# Altium PCB FAT41.PCBDOC
Units mm, origin at the board's own origin, x right, y up, seen from the top; angles counter-clockwise.
Board outline 111.4 x 161.1 mm, 2 copper layers (Top Layer, Bottom Layer); 102 components, 268 nets, 378 pads, 212 vias.
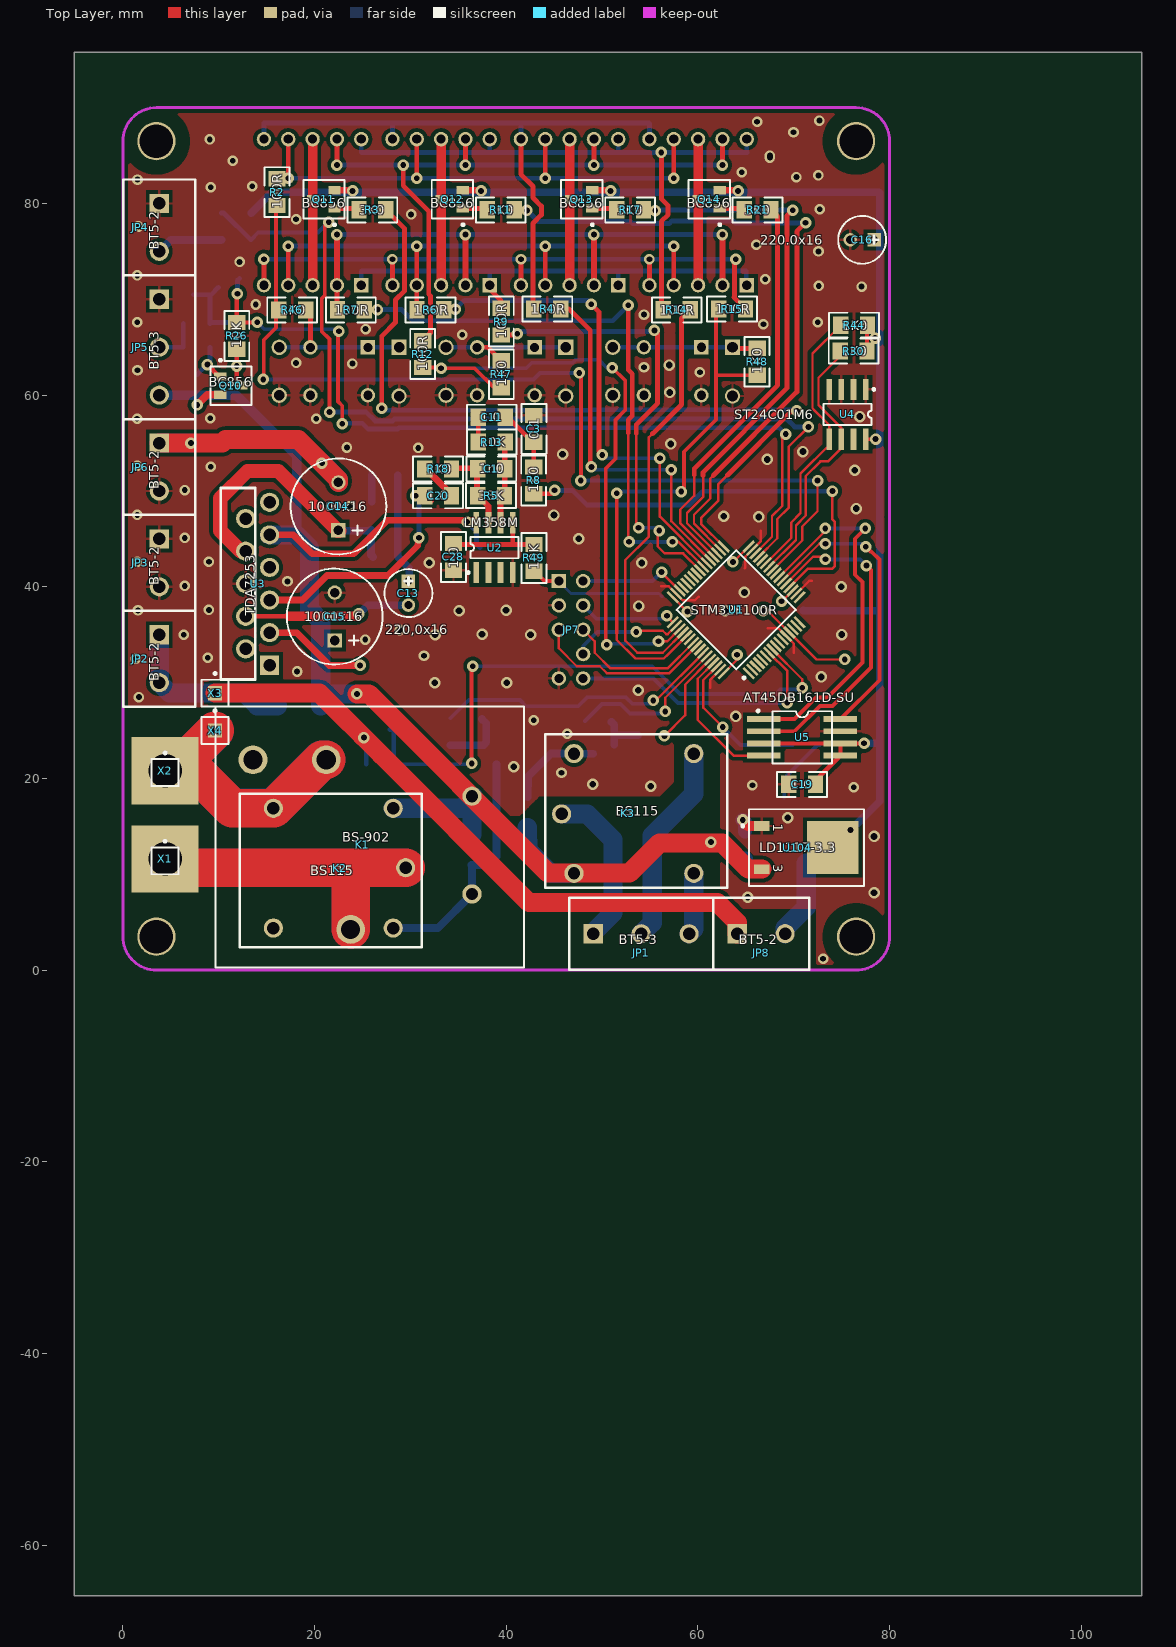
[diagram p0: Top Layer view]
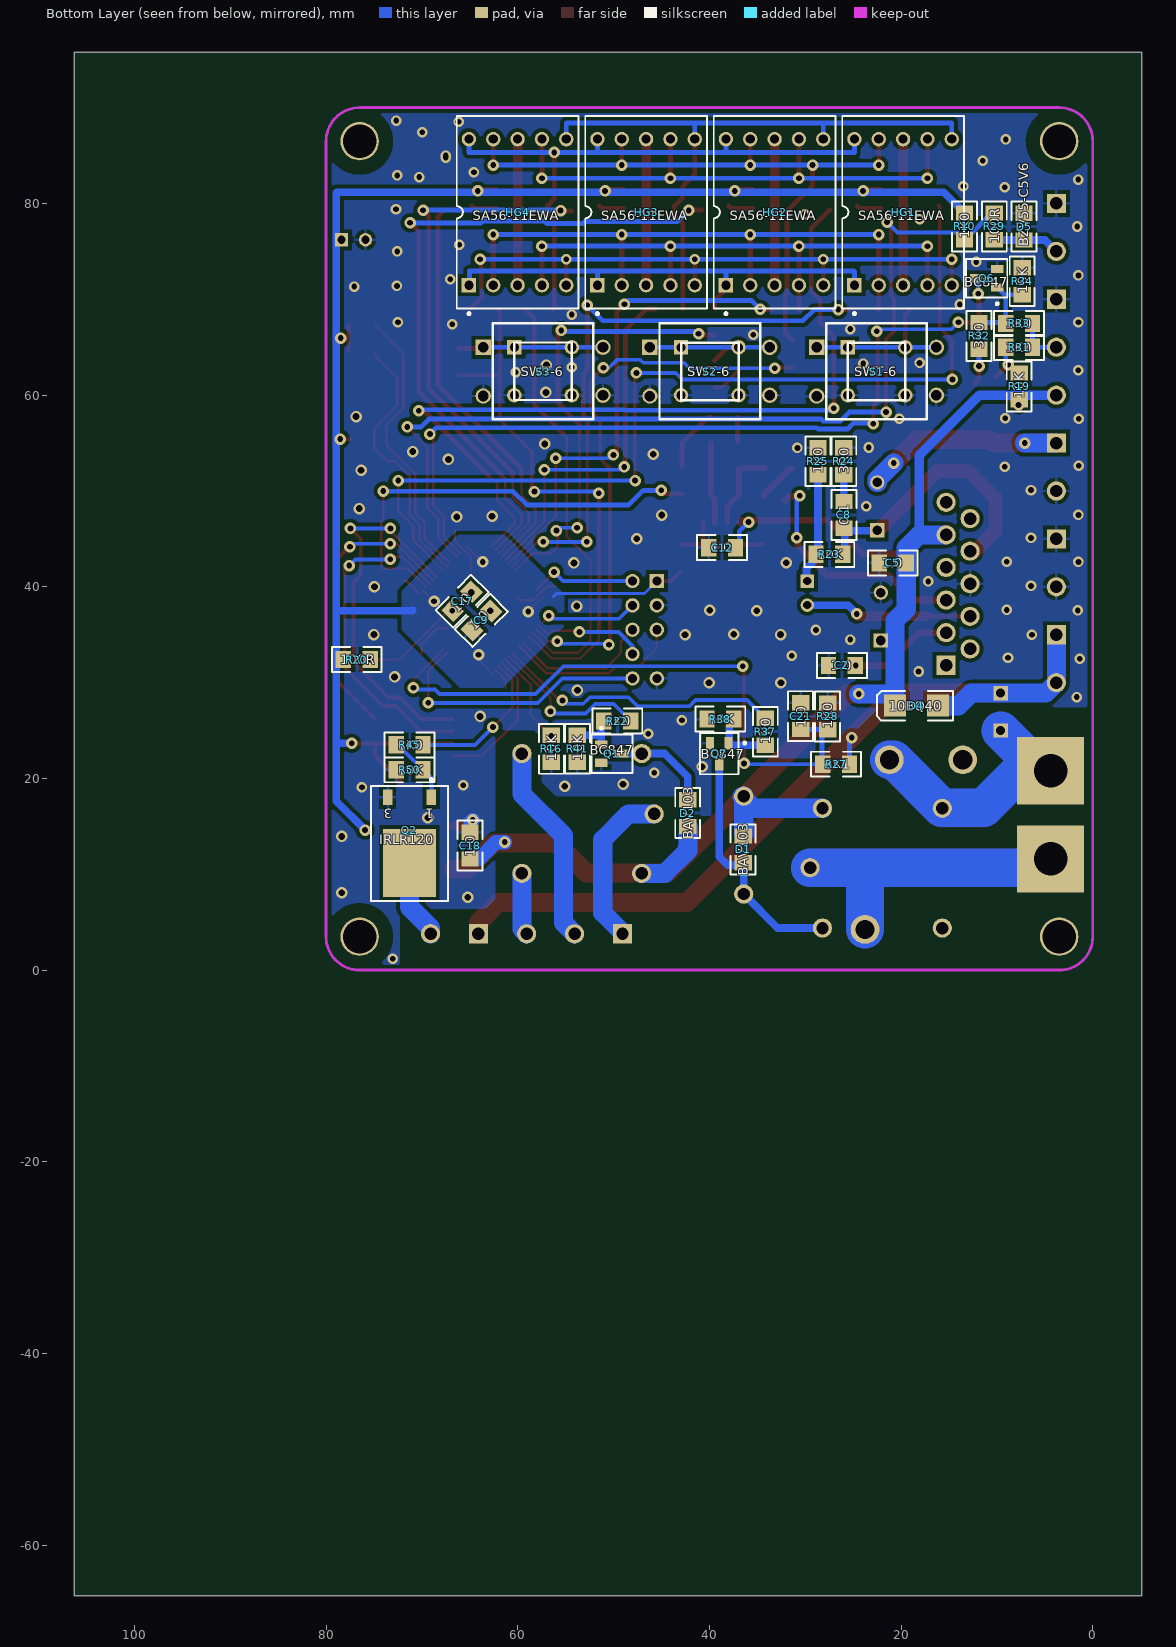
[diagram p1: Bottom Layer view, seen from below]

## Layer stack, top to bottom
Top Layer: signal copper 0.0356
Dielectric: dielectric 0.32, FR-4, Dk 4.8
Bottom Layer: signal copper 0.0356

## Board outline
-5.1,94.4 -5.1,-65.3 106.3,-65.3 106.3,95.8 -5.1,95.8

## Design rules (kind name [scope] priority, off if disabled: settings)
Clearance Clearance_1 [HasPad('Free-3') vs InPoly] p1: gap=1.5
Clearance Polygon [All vs InPoly] p2: gap=0.4
Clearance [All] p3: gap=0.19
ComponentClearance [All] p1: gap=0.254 collisioncheckmode=0
HoleSize [All] p1: absolutevalues=TRUE maxlimit=5 minlimit=0.025 maxpercent=80.000 minpercent=20.000
MinimumAnnularRing [All] p1: minimumring=0.25
PolygonConnect [All] p1: connectstyle=Relief reliefconductorwidth=0.254 reliefentries=4 polygonreliefangle="90 Angle"
RoutingLayers [All] p1: top layer=Horizontal bottom layer=Vertical
RoutingVias [All] p1: holewidth=0.6 width=1.2 viastyle="Through Hole" minholewidth=0.6 minwidth=1.1 maxholewidth=0.8 maxwidth=1.3
SolderMaskExpansion [All] p1: expansion=0.102
TestPointUsage [All] p1: valid=0 allowmultiple=FALSE
Testpoint [All] p1: side=15 testpointundercomponent=TRUE minsize=1.016 maxsize=2.54 preferedsize=1.524 minholesize=0 maxholesize=1.016 preferedholesize=0.813 testpointgrid=0.025 style=1023 order=-539222988
Width [All] p1: maxlimit=5 minlimit=0.2 preferedwidth=0.254 toplayer_prefwidth=0.25 bottomlayer_prefwidth=0.3 minimp=50.000000 maximp=50.000000 favimp=50.000000
15 further rules are at their usual default settings.

## Classes and differential pairs
component class BTp: C12 C15 C16 C18 C19 D1 D2 D4 JP1 JP2 JP3 JP8 K1 K2 K3 P0_18 Q1 Q2 Q7 R22 R37 R38 R41 R45 R50 U104 X1 X2 X3 X4
component class FAT6: C1 C2 C3 C5 C8 C9 C11 C13 C14 C17 C20 C21 C22 C28 D5 HG1 HG2 HG3 HG4 JP4 JP5 JP6 JP7 P0_1 P0_15 P0_17 P0_18 P0_22 Q6 Q10 Q11 Q12 Q13 Q14 R2 R3 R4 R5 R6 R7 R8 R9 R10 R11 R12 R13 R14 R15 R16 R17 R18 R19 R20 R21 R23 R24 R25 R26 R27 R28 R29 R30 R31 R32 R33 R34 R44 R46 R47 R48 R49 S1 S2 S3 U1 U2 U3 U4 U5 X5 X6 X7 X8 X9 X11

## Components (designator, comment, footprint, x,y, rotation, side; value= is the part's Value field where it differs from the comment)
C1 "1n0" _1206#1 38.451,52.324 r0 top (schematic designator C?)
C2 "1.0" C3216-1206#1 26.174,31.792 r0 bottom (schematic designator C?)
C3 "0.1" _1206#1 42.874,56.492 r90 top (schematic designator C?)
C5 "1.0" C3216-1206#1 20.874,42.492 r0 bottom
C8 "0.1" C3216-1206#1 25.974,47.492 r270 bottom
C9 "1.0" C3216-1206#2 63.8,36.5 r315 bottom
C11 "1.0" _1206#1 38.474,57.692 r180 top (schematic designator C?)
C12 "1.0" _1206#1 38.674,44.092 r180 bottom
C13 "220,0x16" el3 29.8,40.6 r270 top
C14 "1000x16" el5 22.481,50.891 r270 top
C15 "1000x16" el5 22.1,39.4 r270 top
C16 "220.0x16" el3 78.4,76.2 r180 top
C17 "1.0" _1206#2 65.8,38.5 r135 bottom
C18 "1.0" _1206#1 64.974,12.992 r270 bottom
C19 "1.0" _1206#1 70.874,19.392 r0 top
C20 "1.0" _1206#1 32.874,49.493 r180 top (schematic designator C?)
C21 "1.0" _1206#1 30.474,26.492 r270 bottom
C28 "1.0" _1206#1 34.5,43.1 r270 top
D1 "BAV103" _1206d 36.474,12.592 r270 bottom
D2 "BAV103" _1206d 42.274,16.392 r90 bottom
D4 "10BQ40" DSO-C2/X2.3 18.4,27.597 r0 bottom
D5 "BZV55-C5V6" _1206d 7.174,77.592 r90 bottom
HG1 "SA56-11EWA" DIP10 19.787,79.096 r90 bottom
HG2 "SA56-11EWA" DIP10 33.195,79.096 r90 bottom
HG3 "SA56-11EWA" DIP10 46.603,79.096 r90 bottom
HG4 "SA56-11EWA" DIP10 60.011,79.096 r90 bottom
JP1 "BT5-3" BT5-3 49.074,3.792 r0 top
JP2 "BT5-2" BT5-2-1 3.8,32.497 r270 top
JP3 "BT5-2" BT5-2-1 3.8,42.497 r270 top
JP4 "BT5-2" BT5-2-1 3.8,77.497 r270 top
JP5 "BT5-3" BT5-3 3.8,69.997 r270 top
JP6 "BT5-2" BT5-2-1 3.8,52.497 r270 top
JP7 "CORTEX_DEBUG_CONNECTOR_PAL" CORTEX_DEBUG_CONNECTOR 45.5,40.6 r270 top
JP8 "BT5-2" BT5-2-1 66.6,3.8 r0 top
K1 "BS-902" BS-902 25,13.097 r90 top
K2 "BS115" BS115 28.2,4.397 r90 top
K3 "BS115" BS115 47.074,22.592 r270 top
Q1 "BC847" SO-G3 50.174,22.592 r270 bottom (schematic designator Q7)
Q2 "IRLR120" SIP-G3/E8 71.3,14.6 r0 bottom
Q6 "BC847" SO-G3 11.074,72.192 r90 bottom
Q7 "BC847" SO-G3 38.974,22.592 r0 bottom
Q10 "BC856" SO-G3 11.274,60.992 r270 top
Q11 "BC856" SO-G3 20.978,80.431 r90 top
Q12 "BC856" SO-G3 34.378,80.431 r90 top
Q13 "BC856" SO-G3 47.878,80.431 r90 top
Q14 "BC856" SO-G3 61.178,80.431 r90 top
R2 "100R" _1206#1 16.074,81.192 r90 top
R3 "3K0" _1206#1 26.039,79.337 r0 top
R4 "100R" _1206#1 44.274,68.992 r180 top
R5 "33K" _1206#1 38.425,49.519 r0 top (schematic designator R?)
R6 "100R" _1206#1 32.074,68.892 r180 top
R7 "100R" _1206#1 23.774,68.892 r180 top
R8 "1K0" _1206#1 42.874,51.092 r270 top (schematic designator R?)
R9 "100R" _1206#1 39.474,67.692 r90 top
R10 "1K0" _1206#1 13.374,77.592 r270 bottom
R11 "3K0" _1206#1 39.439,79.337 r0 top
R12 "100R" _1206#1 31.274,64.292 r90 top
R13 "10K" _1206#1 38.474,55.092 r180 top (schematic designator R?)
R14 "100R" _1206#1 57.774,68.892 r180 top
R15 "100R" _1206#1 63.574,68.992 r0 top
R16 "10K" _1206#2 56.5,23.1 r90 bottom
R17 "3K0" _1206#1 52.939,79.337 r0 top
R18 "1K0" _1206#1 32.874,52.293 r180 top (schematic designator R?)
R19 "10K" _1206#1 7.674,60.892 r270 bottom
R20 "100R" _1206#2 76.8,32.4 r0 bottom
R21 "3K0" _1206#1 66.239,79.337 r0 top
R22 "1K0" _1206#1 49.6,26 r180 bottom (schematic designator R37)
R23 "10K" _1206#1 27.474,43.392 r180 bottom
R24 "3R0" _1206#1 25.974,53.092 r270 bottom
R25 "1K0" _1206#1 28.674,53.092 r270 bottom
R26 "10K" _1206#1 11.874,66.192 r90 top
R27 "5K1" _1206#1 26.774,21.492 r180 bottom
R28 "1K0" _1206#1 27.674,26.492 r90 bottom
R29 "100R" _1206#1 10.274,77.592 r270 bottom
R30 "1K0" _1206#2 76.25,64.602 r0 top
R31 "3K0" _1206#1 7.674,64.992 r180 bottom
R32 "3K0" _1206#1 11.874,66.192 r90 bottom
R33 "3K0" _1206#1 7.674,67.492 r180 bottom
R34 "10K" _1206#1 7.374,71.892 r90 bottom
R37 "1K0" _1206#1 34.174,24.892 r90 bottom
R38 "10K" _1206#1 38.874,26.192 r0 bottom
R41 "10K" _1206#1 53.774,23.092 r270 bottom
R44 "1K0" _1206#2 76.3,67.3 r0 top
R45 "1K0" _1206#1 71.3,23.5 r0 bottom
R46 "1K0" _1206#1 17.674,68.892 r0 top
R47 "1K0" _1206#1 39.474,62.192 r90 top
R48 "1K0" _1206#1 66.174,63.492 r90 top
R49 "10K" _1206#1 42.9,43 r270 top
R50 "10K" _1206#1 71.3,20.9 r0 bottom
S1 "SWT-6" SWT-6-9 22.579,62.488 r180 bottom
S2 "SWT-6" SWT-6-9 39.979,62.488 r180 bottom
S3 "SWT-6" SWT-6-9 57.374,62.492 r180 bottom
U1 "STM32F100R" F-QFP10X10-G64/N 64,37.6 r135 top
U2 "LM358M" SO-G8#1 38.774,44.093 r0 top
U3 "TDA7253" Clipwatt11 15.3,31.797 r90 top
U4 "ST24C01M6" SO-G8#2 75.6,58 r180 top
U5 "AT45DB161D-SU" at45w 70.874,24.292 r270 top (schematic designator U?)
U104 "LD1117-3.3" SIP-G3/C7.4 70.374,12.792 r270 top
X1 "" PIN3 4.4,11.397 r0 top
X2 "" PIN3 4.4,20.597 r0 top
X3 "" PIN1 9.6,28.897 r0 top
X4 "" PIN1 9.6,24.997 r0 top

## Footprints (in the part's own frame and the unit in brackets; to place one, negate y for a bottom-side part, rotate by r counter-clockwise, add the part's x,y. Pads: shape width x height; smd on the part's side, far side on the other; paste and mask are expansions set on the pad)
_1206#1 [mm]
  rect 1.6x1.8 smd: 1(-1.412,-0.007) 2(1.388,-0.007)
  silkscreen extent -2.61,-1.31 2.59,1.29
_1206#2 [mm]
  rect 1.6x1.8 smd: 1(-1.404,-0.002) 2(1.396,-0.002)
  silkscreen extent -2.6,-1.3 2.6,1.3
_1206d [mm]
  rect 1.6x1.8 smd: 1(1.395,-0.009) 2(-1.405,-0.009)
  silkscreen extent -2.6,-1.31 2.6,1.29
at45w [mm]
  rect 0.6x3.5 smd: 1(-1.905,-4) 2(-0.635,-4) 3(0.635,-4) 4(1.905,-4) 5(1.905,4) 6(0.635,4) 7(-0.635,4) 8(-1.905,4)
  silkscreen extent -2.88,-4.72 2.73,3.1
BS115 [mm]
  round 2 hole 1.3: 1(6.292,-1.304) 2(-0.008,12.496) 3(12.492,12.496) 4(-0.008,-0.004) 5(12.492,-0.004)
  silkscreen extent -2.01,-3 13.99,16
BS-902 [mm]
  round 3 hole 2: 1(-8.85,1.235) 2(8.85,11.425) 3(8.85,3.775)
  round 2 hole 1.3: 4(-5.15,-11.425) 5(5.05,-11.425)
  silkscreen extent -12.8,-16.84 14.4,15.36
BT5-2-1 [mm]
  round 2 on Top Overlay: 0(-2.5,-4)
  rect 2x2 hole 1.3: 1(-2.5,0)
  round 2 hole 1.3: 2(2.5,0)
  silkscreen extent -5,-3.75 5,3.75
BT5-3 [mm]
  round 2 on Top Overlay: 0(-0.001,-4.001)
  rect 2x2 hole 1.3: 1(-0.001,-0.001)
  round 2 hole 1.3: 2(4.999,-0.001) 3(9.999,-0.001)
  silkscreen extent -2.5,-3.75 12.5,3.75
C3216-1206#1 [mm]
  rect 1.6x1.8 smd: 1(-1.405,0.002) 2(1.395,0.002)
  silkscreen extent -2.6,-1.3 2.6,1.3
C3216-1206#2 [mm]
  rect 1.6x1.8 smd: 1(-1.397,0.007) 2(1.403,0.007)
  silkscreen extent -2.6,-1.29 2.6,1.31
Clipwatt11 [mm]
  rect 2x2 hole 1.3: 1(0.022,-0.004)
  round 2 hole 1.3: 2(1.722,2.496) 3(3.422,-0.004) 4(5.122,2.496) 5(6.822,-0.004) 6(8.522,2.496) 7(10.222,-0.004) 8(11.922,2.496) 9(13.622,-0.004) 10(15.322,2.496) 11(17.022,-0.004)
  silkscreen extent -1.48,1.5 18.52,5.1
CORTEX_DEBUG_CONNECTOR [mm]
  rect 1.5x1.5 hole 0.95: 1(0.001,-0.012)
  round 1.5 hole 0.95: 2(0.001,2.528) 3(2.541,-0.012) 4(2.541,2.528) 5(5.081,-0.012) 6(5.081,2.528) 8(7.621,2.528) 9(10.161,-0.012) 10(10.161,2.528)
DIP10 [mm]
  rect 1.5x1.5 hole 0.95: 1(-7.626,5.086)
  round 1.5 hole 0.95: 2(-7.626,2.546) 3(-7.626,0.006) 4(-7.626,-2.534) 5(-7.626,-5.074) 6(7.614,-5.074) 7(7.614,-2.534) 8(7.614,0.006) 9(7.614,2.546) 10(7.614,5.086)
  silkscreen extent -10.71,-6.34 10.03,6.36
DSO-C2/X2.3 [mm]
  rect 2.3x2.3 smd: 1(-2.252,0.001) 2(2.248,0.001)
  silkscreen extent -3.8,-1.55 4.1,1.55
el3 [mm]
  rect 1.4x1.4 hole 0.85: 1(0.011,-0.008)
  round 1.4 hole 0.85: 2(2.511,-0.008)
  silkscreen extent -1.24,-2.5 3.76,2.49
el5 [mm]
  rect 1.5x1.5 hole 1: 1(5.001,0.007)
  round 1.5 hole 1: 2(0.001,0.007)
  silkscreen extent -2.5,-4.99 7.5,5.01
F-QFP10X10-G64/N [mm]
  rect 1.6x0.3 smd: 1(-5.598,3.754) 2(-5.598,3.254) 3(-5.598,2.754) 4(-5.598,2.254) 5(-5.598,1.754) 6(-5.598,1.254) 7(-5.598,0.754) 8(-5.598,0.254) 9(-5.598,-0.246) 10(-5.598,-0.746) 11(-5.598,-1.246) 12(-5.598,-1.746) 13(-5.598,-2.246) 14(-5.598,-2.746) 15(-5.598,-3.246) 16(-5.598,-3.746) 33(5.602,-3.746) 34(5.602,-3.246) 35(5.602,-2.746) 36(5.602,-2.246) 37(5.602,-1.746) 38(5.602,-1.246) 39(5.602,-0.746) 40(5.602,-0.246) 41(5.602,0.254) 42(5.602,0.754) 43(5.602,1.254) 44(5.602,1.754) 45(5.602,2.254) 46(5.602,2.754) 47(5.602,3.254) 48(5.602,3.754)
  rect 0.3x1.6 smd: 17(-3.748,-5.596) 18(-3.248,-5.596) 19(-2.748,-5.596) 20(-2.248,-5.596) 21(-1.748,-5.596) 22(-1.248,-5.596) 23(-0.748,-5.596) 24(-0.248,-5.596) 25(0.252,-5.596) 26(0.752,-5.596) 27(1.252,-5.596) 28(1.752,-5.596) 29(2.252,-5.596) 30(2.752,-5.596) 31(3.252,-5.596) 32(3.752,-5.596) 49(3.752,5.604) 50(3.252,5.604) 51(2.752,5.604) 52(2.252,5.604) 53(1.752,5.604) 54(1.252,5.604) 55(0.752,5.604) 56(0.252,5.604) 57(-0.248,5.604) 58(-0.748,5.604) 59(-1.248,5.604) 60(-1.748,5.604) 61(-2.248,5.604) 62(-2.748,5.604) 63(-3.248,5.604) 64(-3.748,5.604)
  silkscreen extent -5.72,-4.4 4.4,4.58
PIN1 [mm]
  rect 1.5x1.5 hole 0.95: 1(0.012,0.005)
  silkscreen extent -1.39,-1.4 1.41,2.18
PIN3 [mm]
  rect 7x7 hole 3.5: 1(0.003,0.209)
  silkscreen extent -1.4,-1.39 1.4,2.19
SIP-G3/C7.4 [mm]
  rect 1x1.6 smd: 1(-2.25,-3.7) 3(2.25,-3.7)
  rect 5.5x5.4 smd: 4(0,3.7)
  silkscreen extent -4,-5.82 4,6.95
SIP-G3/E8 [mm]
  rect 1x1.6 smd: 1(-2.285,-3.431) 3(2.285,-3.431)
  rect 5.5x7.1 smd: 4(0,3.419)
  silkscreen extent -4,-5.41 4,7.37
SO-G3 [mm]
  rect 0.85x1.3 smd: 1(-0.948,-1.102) 2(0.952,-1.102) 3(0.002,1.098)
  silkscreen extent -2.77,-2.15 2,2.15
SO-G8#1 [mm]
  rect 0.6x2.2 smd: 1(-1.902,-2.611) 2(-0.632,-2.611) 3(0.638,-2.611) 4(1.908,-2.611) 5(1.908,2.589) 6(0.638,2.589) 7(-0.632,2.589) 8(-1.902,2.589)
  silkscreen extent -2.88,-2.74 2.5,1.09
SO-G8#2 [mm]
  rect 0.6x2.2 smd: 1(-1.905,-2.6) 2(-0.635,-2.6) 3(0.635,-2.6) 4(1.905,-2.6) 5(1.905,2.6) 6(0.635,2.6) 7(-0.635,2.6) 8(-1.905,2.6)
  silkscreen extent -2.88,-2.72 2.5,1.1
SWT-6-9 [mm]
  rect 1.6x1.6 hole 1.1: 1(-6.234,2.497)
  rect 1.5x1.5 hole 0.95: 1(-2.984,2.499)
  round 1.5 hole 0.95: 1(3.016,2.499) 2(-2.984,-2.501) 2(3.016,-2.501)
  round 1.6 hole 1.1: 1(6.266,2.497) 2(-6.234,-2.583) 2(6.266,-2.503)
  silkscreen extent -5.23,-5 5.27,5

## Part data
C1 C2 C3 C5 C8 C9 C11 C17 C20 C21 C28: library part "Cap Semi", "Capacitor (Semiconductor SIM Model)"
C12 C18 C19: library part Cap, "Capacitor"
C13 C14 C15: library part "Cap Pol1", "Polarized Capacitor (Radial)"
C16: library part "Cap Pol", "Polarized Capacitor (Radial)"
D1 D2 D4: library part 10BQ015, "Schottky Rectifier"
D5: library part "D Zener", "Zener Diode"
HG1 HG2 HG3 HG4: library part SA05
JP1 JP5: library part "Header 3", "Header, 3-Pin"
JP2 JP3 JP4 JP6 JP8: "Header, 3-Pin"
K1: library part BS115, "Single-Pole Dual-Throw Relay"
K2 K3: "Single-Pole Dual-Throw Relay"
Q1 Q6 Q7: library part BC847ALT1, "General Purpose Transistor NPN Silicon"
Q2: library part IRFR120, "HEXFET N-Channel Power MOSFET"
Q10 Q11 Q12 Q13 Q14: library part GT109
R2 R3 R4 R6 R7 R9 R10 R11 R12 R14 R15 R16 R17 R19 R21 R23 R24 R25 R26 R30 R44 R46 R47 R48: library part RES, "Resistor"
R5 R8 R13 R18 R20 R22 R27 R28 R29 R31 R32 R33 R34 R37 R38 R41 R45 R49 R50: library part Res2, "Resistor"
S1 S2 S3: "Switch"
U1: "STM32 ARM-based 32-bit MCU with 64 Kbytes Flash, 64-pin LQFP, Industrial Temperature"
U2: "Low-Power Dual Operational Amplifier"
U4: "Serial 1K (128 x 8) EEPROM"
U104: library part REG1117-3.3, "800mA and 1A Low Dropout Positive Regulator 2.85V, 3.3V, 5V, and Adjustable"
X1 X2 X3 X4: library part Socket, "Socket"

## Free pads (board coordinates)
  round 4 hole 3.5: 3(3.5,3.5) 3(3.5,86.5) 3(76.5,3.5) 3(76.5,86.5)

## Via types
v1: diameter 1.2, hole 0.6, Top Layer to Bottom Layer, 105 vias
v2: diameter 1.1, hole 0.6, Top Layer to Bottom Layer, 70 vias
v3: diameter 1.2, hole 0.7, Top Layer to Bottom Layer, 37 vias

## Nets (pads, with @x,y where several pads share a name; then routed paths per layer and width w, separated by ;. In a path a pad name is that pad's centre, name@x,y a point inside that pad or via, vN(x,y) a via of type N, cw(c..) or ccw(c..) an arc to the next point about the centre after c; other vN are vias at no path point)
+3V3: C9.2 C16.1 C19.2 JP7.1 Q11.2 Q12.2 Q13.2 Q14.2 R10.1 R20.2 R30.2 R44.2 R49.2 U1.19 U1.32 U1.48 U1.64 U4.8 U5.3 U5.5 U5.6 U104.4 | length 194.3
  Top Layer w0.25: U1.48 58.875,37.415 v1(58.91,37.415) ; U1.64 64.084,32.383 v1(64.084,32.917) ; v1@63.909,42.789 63.909,42.814 U1.32 ; v1(68.732,38.49) 68.777,38.49 U1.19
  Top Layer w0.4: R49.2@43.039,41.564 44.004,40.599 JP7.1 ; U5.3 77.319,23.657 v1(77.33,23.669) ; U5.5 U5.6 ; U4.8 78.519,55.4 v1(78.53,55.411) ; R30.2 77.646,67.248 R44.2 ; 77.646,65.958 v1(78.48,65.958)
  Top Layer w0.5: C19.2@72.261,19.467 C19.2 72.261,19.772 U5.5@74.856,22.367
  Top Layer w0.7: Q11.2 23.887,81.383 v1(23.969,81.302) ; Q12.2@35.477,81.383 v1@37.284,81.383 ; Q13.2@48.998,81.383 v1@50.805,81.383 ; Q14.2@62.295,81.383 v1@64.102,81.383
  Bottom Layer w0.3: JP7.1 46.772,39.315 55.924,39.315 56.274,38.965
  Bottom Layer w0.8: R10.1 15.552,81.177 78.88,81.177 78.955,81.102 78.955,17.645 v1(75.931,14.621) ; 70.974,37.54 71.024,37.49 78.955,37.49 ; v1(77.33,23.669) 78.955,23.669
  other v1: 63.659,42.589 37.365,81.302 50.887,81.302 64.184,81.302
+12: D4.1 JP2.1 JP2.2 JP8.1 R27.2 X3.1 | length 87.1
  Top Layer w2: X3.1 20.51,28.902 26.945,22.467 42.364,7.048 62.034,7.048 64.1,4.982 JP8.1 ; v1@24.969,24.444 v1(25.144,24.269)
  Bottom Layer w0.5: v1(25.144,24.269) 25.144,24.069 25.386,23.826 R27.2
  Bottom Layer w2: JP2.1 JP2.2 4.895,28.902 X3.1 12.71,28.902 14.016,27.596 D4.1
+12V: C5.1 C12.2 C15.1 C18.2 D1.2 D2.2 D4.2 JP5.3 K1.5 K2.5 K3.5 Q10.2 R19.2 U2.8 U3.9 U104.3 | length 158.6
  Top Layer w0.7: U3.9 17.786,45.42 19.745,43.461 24.094,43.461 27.568,46.935 36.618,46.935 U2.8
  Top Layer w0.8: v1(7.748,58.982) 8.806,60.041 Q10.2
  Top Layer w2: v1(24.419,28.818) 25.691,28.818 44.364,10.145 52.861,10.145 55.986,13.269 62.534,13.269 65.261,10.542 U104.3
  Bottom Layer w0.5: v1(35.916,46.76) 36.891,45.786 36.891,44.481 C12.2
  Bottom Layer w1: JP5.3 11.805,59.999 18.12,53.684 18.12,45.261
  Bottom Layer w1.5: v1(61.359,13.369) 61.334,13.344 62.284,13.344 64.023,11.605 C18.2
  Bottom Layer w2: U3.9 18.111,45.42 19.47,44.061 19.47,37.638 20.648,36.46 D4.2 ; 20.795,28.768 20.845,28.818 v1(24.419,28.818) ; K2.5 35.362,16.89 K1.5@36.591,18.118 ; D1.2@36.425,14.185 K1.5 ; D2.2@42.189,14.869 42.265,12.494 44.658,10.1 K3.5
GND: C2.2 C3.2 C5.2 C9.1 C12.1 C15.2 C16.2 C17.2 C18.1 C19.1 C21.1 C28.2 D5.1 JP3.1 JP3.2 JP4.1 JP5.1 JP6.2 JP7.3 JP7.9 Q1.2 Q2.3 Q6.2 Q7.2 R16.1 R24.1 R25.1 R28.2 R34.2 R38.2 R41.2 R50.2 S1.2 S2.2 S3.2 U1.12 U1.18 U1.31 U1.47 U1.63 U2.4 U3.6 U4.1 U4.2 U4.3 U4.4 U5.7 U104.1 | length 21.7
  Top Layer w0.25: 56.174,40.04 56.958,40.04 58.408,38.59 59.699,38.59 60.074,38.965 ; 61.274,29.442 61.274,30.28 U1.63 ; 64.874,41.939 64.933,41.999 64.933,43.132 66.574,44.772 66.574,45.838 ; 67.274,35.691 68.378,35.691 70.007,34.062 70.007,33.095 ; U1.18 71.608,40.615 71.874,40.615
  Top Layer w1: v1(64.683,15.668) 64.683,15.541 65.182,15.042 U104.1
  Bottom Layer w1.5: v1(64.683,15.668) 64.908,15.443 C18.1@64.908,14.494
  other v2: 73.056,1.195 76.255,19.095 65.683,19.295 45.763,20.595 46.374,24.666 42.874,26.066 1.675,28.495 18.174,31.164 1.35,32.495 8.848,32.595 31.417,32.795 25.294,34.495 6.348,34.995 28.893,35.495 1.574,37.538 8.974,37.588 6.448,40.095 17.174,40.562 1.5,42.595 8.974,42.612 6.448,45.095 1.5,47.495 23.644,48.395 6.448,50.095 9.174,52.534 1.474,52.634 30.817,54.495 23.374,54.533 1.474,57.533 20.174,57.533 9.123,57.595 60.21,62.395 1.525,62.595 54.374,62.909 23.944,63.295 18.074,63.356 35.416,66.295 25.319,66.895 66.833,67.395 1.5,67.595 72.506,67.595 54.374,68.407 13.874,69.457 77.074,71.332 72.606,71.395 67.033,72.095 1.5,72.495 12.172,73.895 72.581,74.995 66.108,75.695 1.625,77.595 18.074,78.355 30.074,78.855 72.706,79.395 9.174,81.702 13.497,81.795 1.525,82.495 70.274,82.754 72.574,82.926 64.574,83.251 11.474,84.451 67.508,84.795 67.508,84.995 9.074,86.675 69.974,87.428 66.174,88.525 72.674,88.65
  other v3: 65.208,7.595 78.374,8.073 78.374,13.946 69.382,15.895 55.086,19.195 49.012,19.395 40.774,21.22 63.934,26.468 53.774,29.218 32.542,29.995 40.04,29.995 72.856,30.592 42.539,34.995 32.574,35.016 75.006,35.016 37.474,35.041 35.074,37.49 62.859,37.49 39.974,37.565 53.836,37.995 64.858,39.415 74.956,40.015 54.136,42.489 31.974,42.514 47.574,45.013 66.358,47.288 62.684,47.363 44.974,47.488 76.53,48.163 76.355,52.162 67.233,53.286 45.874,53.836 70.957,54.111 57.174,54.911 76.874,57.76 57.06,60.285 57.01,63.134
NetC1_1: C1.1 R5.1 R18.1 U2.7 | length 8.9
  Top Layer w0.6: R18.1@34.166,52.359 36.916,52.359 36.941,52.334 36.941,49.61 37.165,49.385 38.141,48.409 U2.7
NetC1_2: C1.2 R5.2 R13.1 U2.6 | length 8.5
  Top Layer w0.6: U2.6 39.411,49.111 39.839,49.538 R13.1@39.84,54.958
NetC2_1: C2.1 U3.3 | length 10.9
  Top Layer w0.7: U3.3 18.114,35.22 21.544,31.789 v1@24.744,31.789
  other v1: 24.744,31.79
NetC3_1: C3.1 C11.1 R8.1 | length 6.7
  Top Layer w0.5: C11.1@39.786,57.699 40.149,57.699 42.867,54.98 R8.1
NetC8_1: C8.1 R24.2 | length 2.8
  Bottom Layer w0.8: C8.1 25.972,51.696 R24.2
NetC8_2: C8.2 C14.1 R23.2 U3.8 | length 29.4
  Top Layer w1: U3.8@12.288,43.72 U3.8
  Top Layer w1.5: U3.8@12.288,43.72 10.147,45.861 10.147,49.235 12.997,52.084 16.221,52.084 22.444,45.861 C14.1@22.594,45.861
  Bottom Layer w0.8: C14.1@22.594,45.861 C8.2@25.893,45.861 ; C8.2@25.893,45.961 25.893,43.311 R23.2@26.093,43.111
NetC11_2: C11.2 R13.2 | length 2.6
  Top Layer w0.5: R13.2 C11.2
NetC13_1: C13.1 R23.1 R25.2 | length 11.5
  Bottom Layer w0.8: R25.2@28.668,51.609 28.668,43.136 29.866,41.939 C13.1@29.866,40.581
NetC13_2: C13.2 U3.4 | length 17.6
  Top Layer w0.5: U3.4 14.303,36.92 14.321,36.938 17.346,36.938
  Top Layer w1: 17.346,36.938 24.394,36.938 v1(24.619,37.163)
  Bottom Layer w0.8: v1@24.569,37.113 25.537,38.081 C13.2@29.866,38.081
NetC14_2: C14.2 JP6.1 | length 26.9
  Top Layer w2: JP6.1 v1(7.098,54.997) 10.361,54.997 10.722,55.358 18.32,55.358 22.481,51.197 C14.2@22.481,50.891
  Bottom Layer w2: JP6.1 v1(7.098,54.997) ; v1(20.77,52.909) 22.481,51.197 C14.2@22.481,50.891
NetC17_1: C17.1 R20.1 U1.13 | length 10.6
  Top Layer w0.25: v1(66.833,37.49) 67.285,37.49 72.359,32.417 v1(75.331,32.417)
NetC20_1: C20.1 R18.2 | length 4
  Top Layer w0.7: R18.2 31.627,52.299 34.286,49.64 C20.1
NetC20_2: C20.2 U3.5 | length 25
  Top Layer w0.7: U3.5 18.727,38.62 21.295,41.187 27.668,41.187 30.761,44.28 30.867,45.086 v1(30.892,45.111) ; v1(30.567,49.51) 30.617,49.46 31.642,49.46 C20.2@32.136,48.966
  Bottom Layer w0.5: v1(30.567,49.51) 30.892,49.185 v1(30.892,45.111)
NetC28_1: C28.1 R49.1 U2.5 | length 10.8
  Top Layer w0.5: C28.1 34.593,44.412 R49.1 ; U2.5 40.681,44.521 40.79,44.412
NetD1_1: D1.1 K1.4 K2.4 Q7.3 | length 25
  Bottom Layer w0.8: K2.4 32.867,4.39 K1.4 D1.1@36.425,10.66 ; D1.1@36.366,10.97 38.09,10.97 38.975,11.855 Q7.3
NetD2_1: D2.1 K3.4 Q1.3 | length 9.9
  Bottom Layer w0.8: D2.1@42.239,18.068 42.265,20.193 44.672,22.6 K3.4 47.079,22.591 Q1.3
NetD5_2: D5.2 JP4.2 R29.2 | length 7
  Bottom Layer w0.8: JP4.2 4.99,76.188 10.263,76.188 R29.2
NetHG1_1: HG1.1 HG2.1 HG3.1 HG4.1 R9.2 | length 49
  Top Layer w0.5: HG2.1 38.281,71.038 39.48,69.839 R9.2
  Bottom Layer w0.5: HG1.1 24.873,72.899 24.927,72.954 65.033,72.954 65.033,71.533 HG4.1 ; HG2.1 38.281,72.938 ; 51.662,72.954 51.689,72.927 HG3.1
NetHG1_2: HG1.2 HG2.2 HG3.2 HG4.2 R7.2 | length 63.9
  Top Layer w0.5: HG1.2 22.333,68.952 R7.2
  Top Layer w0.6: HG1.2 v1(22.333,76.751) ; HG2.2 v1(35.741,76.751) ; HG3.2 v1(49.149,76.751) ; HG4.2 v1(62.557,76.751)
  Bottom Layer w0.5: v1(22.333,76.751) v1(35.741,76.751) v1(62.557,76.751)
NetHG1_3: HG1.3 HG1.8 Q11.3 | length 15.2
  Top Layer w1: HG1.3 HG1.8
NetHG1_4: HG1.4 HG2.4 HG3.4 HG4.4 R6.2 | length 59.2
  Top Layer w0.5: HG1.4 v1(17.253,75.546) ; R6.2@30.548,68.899 R6.2 30.661,68.924 v1(30.661,75.546) ; HG3.4 v1(44.069,75.546) ; HG4.4 v1(57.477,75.546)
  Bottom Layer w0.5: v1(17.253,75.546) 30.661,75.546 v1@57.477,75.546
NetHG1_5: HG1.5 HG2.5 HG3.5 HG4.5 R15.2 | length 65.5
  Top Layer w0.5: HG1.5 v1@14.713,74.077 ; HG2.5 v2@28.121,74.077 ; HG3.5 v2@41.529,74.077 ; HG4.5 v2@54.937,74.077 ; 63.734,70.213 R15.2 ; v1@63.734,74.028 63.934,74.228 v1(63.934,74.178) ; 63.809,70.304 v1@63.809,74.12
  Bottom Layer w0.5: v1(14.713,74.178) v1(63.934,74.178)
  other v2: 28.118,74.178 41.539,74.178 54.936,74.178
NetHG1_6: HG1.6 HG2.6 HG3.6 HG4.6 R4.2 | length 65.9
  Top Layer w0.5: HG3.6 41.529,83.037 42.789,81.776 42.789,80.602 43.664,79.727 43.664,78.802 42.789,77.927 R4.2@42.789,69.005
  Bottom Layer w0.5: HG1.6 14.713,88.392 41.523,88.392 41.529,88.385 ; HG2.6 28.121,88.388 ; HG3.6 41.529,88.385 ; HG4.6 54.937,88.369 54.921,88.385 41.529,88.385
NetHG1_7: HG1.7 HG2.7 HG3.7 HG4.7 R2.2 | length 56.5
  Top Layer w0.5: v1(17.253,82.632) HG1.7 ; v1(30.661,82.632) HG2.7 ; v1(44.069,82.632) HG3.7 ; v1(57.477,82.632) HG4.7
  Bottom Layer w0.5: v1(17.253,82.632) v1(57.477,82.632)
NetHG1_9: HG1.9 HG2.9 HG3.9 HG4.9 R12.2 | length 70.6
  Top Layer w0.5: v1@22.333,84.101 HG1.9 ; v1(29.243,84.001) 29.243,81.851 31.917,79.177 31.917,70.529 32.092,70.354 32.092,66.491 R12.2 ; v1(35.741,84.001) 35.741,84.101 HG2.9 ; v1@49.149,84.101 HG3.9 ; v1@62.557,84.101 HG4.9
  Bottom Layer w0.5: v1(22.333,84.001) v1(35.741,84.001) v1(62.557,84.001)
  other v1: 49.149,84.001
NetHG1_10: HG1.10 HG2.10 HG3.10 HG4.10 R14.2 | length 62.9
  Top Layer w0.5: v1(56.186,85.326) 56.186,80.477 56.885,79.777 56.885,78.827 56.186,78.127 56.186,69.099 R14.2
  Bottom Layer w0.5: HG1.10 24.873,85.33 24.877,85.326 65.108,85.326 65.097,85.337 HG4.10 ; 38.281,85.335 HG2.10 ; 51.662,85.326 51.689,85.353 HG3.10
NetHG2_3: HG2.3 HG2.8 Q12.3 | length 15.2
  Top Layer w1: HG2.3 HG2.8
NetHG3_3: HG3.3 HG3.8 Q13.3 | length 15.2
  Top Layer w1: HG3.3 HG3.8
NetHG4_3: HG4.3 HG4.8 Q14.3 | length 15.2
  Top Layer w1: HG4.3 HG4.8
NetJP1_1: JP1.1 K3.1 | length 16.8
  Bottom Layer w2: K3.1 48.456,16.3 51.137,13.619 51.137,5.996 JP1.1@49.212,4.071
NetJP1_2: JP1.2 K3.2 | length 21.1
  Bottom Layer w2: JP1.2 55.236,4.955 55.236,14.044 59.57,18.378 K3.2
NetJP1_3: JP1.3 K3.3 | length 6.5
  Bottom Layer w2: JP1.3 59.57,4.289 K3.3
NetJP5_2: JP5.2 R31.2 R33.2 | length 5
  Bottom Layer w0.5: JP5.2 6.273,64.999 R31.2 R33.2
NetJP8_2: JP8.2 Q2.4 | length 8.3
  Bottom Layer w2: JP8.2 69.1,4.391 71.3,6.592 Q2.4
NetK1_1: K1.1 K2.1 X1.1 | length 63.7
  Top Layer w4: X1.1 5.319,10.69 K2.1 K2.1@29.484,10.67 ; K1.1 23.765,10.641 23.794,10.67
  Bottom Layer w4: X1.1 6.237,11.606 7.153,10.69 K2.1 ; K1.1 23.765,10.499
NetK1_3: K1.3 K2.3 X2.1 X4.1 | length 53.9
  Top Layer w4: X2.1 7.484,20.806 11.401,16.89 15.742,16.89 20.8,21.947 K1.3 ; X2.1@5.416,20.806 X4.1
  Bottom Layer w4: X4.1 9.612,24.98 5.437,20.806 X2.1 7.509,20.806 11.372,16.943 15.746,16.943 20.75,21.947 K1.3
NetQ1_1: Q1.1 R22.1 R41.1 | length 5
  Bottom Layer w0.8: R22.1@50.986,25.886 51.276,25.596 Q1.1 ; 51.276,24.491 51.289,24.505 R41.1
NetQ2_1: Q2.1 R45.2 R50.1 | length 7.1
  Bottom Layer w0.4: Q2.1 69.015,20.034 72.487,23.507 R45.2
NetQ6_1: Q6.1 R32.2 R33.1 R34.1 | length 8.7
  Bottom Layer w0.5: R34.1 9.208,70.48 Q6.1 ; 9.073,70.48 9.086,70.466 R33.1 9.18,67.58 R32.2
NetQ7_1: Q7.1 R37.1 R38.1 | length 6.5
  Bottom Layer w0.8: R37.1 37.629,23.48 37.915,23.766 37.915,25.745 R38.1
NetQ10_1: Q10.1 R19.1 R31.1 | length 5.2
  Top Layer w0.5: v1(8.815,63.189) 8.848,63.156 10.063,61.941 Q10.1
  Bottom Layer w0.5: R19.1@7.773,62.157 9.086,63.47 R31.1
NetQ10_3: Q10.3 R26.1 R32.1 | length 5.6
  Top Layer w0.5: v1(11.872,63.031) v1@11.88,63.031 ; R26.1 11.88,61.673 Q10.3@12.347,61.207
  Bottom Layer w0.5: v1(11.872,63.031) R32.1@11.872,64.881
NetQ11_1: Q11.1 R3.1 | length 2.6
  Top Layer w0.5: Q11.1 24.324,79.483 R3.1@24.565,79.725
NetQ12_1: Q12.1 R11.1 | length 2.6
  Top Layer w0.5: Q12.1 37.724,79.483 R11.1@37.965,79.725
NetQ13_1: Q13.1 R17.1 | length 2.6
  Top Layer w0.5: Q13.1 51.223,79.483 R17.1@51.465,79.725
NetQ14_1: Q14.1 R21.1 | length 2.6
  Top Layer w0.5: Q14.1 64.523,79.483 R21.1@64.765,79.725
NetR16_2: R16.2 U1.60 | length 9.9
  Top Layer w0.25: v1(56.511,24.444) 58.66,26.593 58.66,29.787 U1.60
NetR46_2: R46.2 S1.1 | length 16.6
  Top Layer w0.5: R46.2 19.562,68.385 S1.1@19.562,64.987
  Bottom Layer w0.5: S1.1@16.312,64.985 16.314,64.987 28.81,64.987 S1.1@28.812,64.985
NetR47_2: R47.2 S2.1 | length 15.8
  Top Layer w0.5: S2.1@36.962,64.987 38.073,64.987 R47.2
  Bottom Layer w0.5: S2.1@33.712,64.985 36.96,64.985 36.962,64.987 42.962,64.987 46.294,64.987 46.292,64.985 S2.1@46.212,64.985
NetR48_2: R48.2 S3.1 | length 15.1
  Top Layer w0.5: S3.1@63.612,64.985 63.717,64.88 R48.2
  Bottom Layer w0.5: S3.1@51.107,64.989 S3.1@63.607,64.989
P0_2: 
P0_3: 
P0_7: 
P0_8: 
P0_9: 
P0_11: 
P0_13: 
P0_15: 
P0_15: 
P0_15: 
P0_15: 
P0_15: 
P0_15: 
P0_15: 
P0_15: 
P0_15: 
P0_15: 
P0_15: 
P0_15: 
P0_15: 
P0_15: 
P0_15: 
P0_15: 
P0_15: 
P0_15: 
P0_15: 
P0_15: 
P0_15: 
P0_15: 
P0_15: 
P0_15: 
P0_15: 
P0_15: 
P0_15: 
P0_15: 
P0_15: 
P0_15: 
P0_16: 
P0_17: 
P0_17: 
P0_17: 
P0_17: 
P0_17: 
P0_17: 
P0_17: 
P0_17: 
P0_17: 
P0_17: 
P0_17: 
P0_17: 
P0_17: 
P0_17: 
P0_17: 
P0_17: 
P0_17: 
P0_17: 
P0_17: 
P0_17: 
P0_17: 
P0_17: 
P0_17: 
P0_17: 
P0_17: 
P0_17: 
P0_17: 
P0_17: 
P0_17: 
P0_17: 
P0_18: 
P0_18: 
P0_18: 
P0_18: 
P0_18: 
P0_18: 
P0_18: 
P0_18: 
P0_18: 
P0_18: 
P0_18: 
P0_18: 
P0_18: 
P0_18: 
P0_18: 
P0_18: 
P0_18: 
P0_18: 
P0_18: 
P0_18: 
P0_18: 
P0_18: 
P0_18: 
P0_18: 
P0_18: 
P0_18: 
P0_18: 
P0_18: 
P0_18: 
P0_18: 
P0_18: 
P0_21: 
P0_22: 
P0_22: 
P0_22: 
P0_22: 
P0_22: 
P0_22: 
P0_22: 
P0_22: 
P0_22: 
P0_22: 
P0_22: 
P0_22: 
P0_22: 
P0_22: 
P0_22: 
P0_22: 
P0_22: 
P0_22: 
P0_22: 
P0_22: 
P0_22: 
P0_22: 
P0_22: 
P0_22: 
P0_22: 
P0_22: 
P0_22: 
P0_22: 
P0_22: 
P0_22: 
P0_22: 
P0_22: 
P0_22: 
P0_22: 
P0_26: 
P0_27: 
P0_28: 
P0_29: 
P0_31: 
P1_10: 
P1_14: 
P2_0: 
P2_2: 
P2_7: 
P2_9: 
P2_10: 
PA3: 
PA4: 
PA4: R8.2 U1.20 | length 46.1
  Top Layer w0.25: U1.20 71.444,41.864 74.006,41.864 74.256,42.114 74.256,46.813 74.031,47.038 v1(74.031,49.987)
  Top Layer w0.5: R8.2 44.681,49.705 v1(45.038,50.062)
  Bottom Layer w0.5: v1(45.038,50.062) 46.888,50.062 48.413,48.538 59.085,48.538 60.51,49.962 74.006,49.962 v1(74.031,49.987)
PA5: 
PA5: 
PA5: 
PA5: U1.21 U5.2 | length 34.7
  Top Layer w0.25: U1.21 72.011,43.139 73.031,43.139 v1(73.306,42.864)
  Top Layer w0.4: U5.2 70.091,24.927 72.731,27.568 74.031,27.568 78.055,31.592 78.055,41.739 v1(77.58,42.214)
  Bottom Layer w0.4: v1(73.306,42.864) 76.93,42.864 v1(77.58,42.214)
PA6: 
PA6: 
PA6: 
PA6: U1.22 U5.8 | length 30.7
  Top Layer w0.25: U1.22 72.654,44.489 v1(73.306,44.489)
  Top Layer w0.4: U5.8 78.93,30.253 78.93,42.839 78.08,43.689 78.005,43.689 v1(77.505,44.189)
  Bottom Layer w0.4: v1(73.306,44.489) 77.205,44.489 v1(77.505,44.189)
PA7: 
PA7: 
PA7: 
PA7: 
PA7: U1.23 U5.1 | length 38.7
  Top Layer w0.25: U1.23 73.281,45.823 v1(73.281,46.088)
  Top Layer w0.4: U5.1 70.086,26.197 72.331,28.443 73.506,28.443 77.155,32.092 77.155,40.49 76.38,41.264 76.38,45.013 v1(77.455,46.088)
  Bottom Layer w0.4: v1(73.281,46.088) v1(77.455,46.088)
PA13: JP7.2 U1.46 | length 11.3
  Top Layer w0.25: v1(56.211,41.539) 56.211,41.494 U1.46
  Bottom Layer w0.4: JP7.2 55.27,40.599 v1(56.211,41.539)
PA14: JP7.4 U1.49 | length 10.4
  Top Layer w0.25: v1(56.76,36.991) 56.76,36.914 U1.49
  Bottom Layer w0.4: JP7.4 49.421,36.666 56.436,36.666 v1(56.76,36.991)
PA15: JP7.8 U1.50 | length 11.7
  Top Layer w0.25: v1(53.561,35.291) 53.686,35.416 56.336,35.416 56.71,35.041 56.842,35.041 U1.50
  Bottom Layer w0.4: JP7.8 48.028,33.831 49.487,35.291 v1(53.561,35.291)
PB0: R30.1 U1.26 U4.6 | length 28
  Top Layer w0.25: U1.26 70.232,44.895 70.232,46.413 71.257,47.438 71.257,51.562 72.781,53.086 73.556,53.086 74.965,54.495 74.965,56.576 73.309,58.233 72.581,58.96 72.581,61.809 74.846,64.074 R30.1
PB1: R44.1 U1.27 U4.5 | length 29.5
  Top Layer w0.25: U1.27 69.732,45.102 69.732,46.713 70.707,47.688 70.707,51.812 73.695,54.8 U4.5 73.695,56.872 71.957,58.61 71.957,64.358 R44.1
PB3: JP7.6 U1.55 | length 15
  Top Layer w0.25: JP7.6 49.237,34.31 49.237,33.117 50.862,31.492 56.829,31.492 U1.55
PB4: JP7.5 U1.56 | length 18.5
  Top Layer w0.25: JP7.5 45.488,33.592 47.363,31.717 49.762,31.717 50.487,30.992 57.036,30.992 U1.56
PB6: R37.2 U1.58 | length 30.4
  Top Layer w0.25: v1(55.336,28.143) 55.336,28.193 55.651,28.193 U1.58
  Bottom Layer w0.4: R37.2 36.08,28.193 41.439,28.193 42.089,27.543 47.488,27.543 48.413,28.468 52.487,28.468 53.161,27.793 54.986,27.793 v1(55.336,28.143)
PB7: R22.2 U1.59 | length 17.2
  Top Layer w0.25: v1(56.586,26.993) 56.586,28.42 U1.59
  Bottom Layer w0.4: R22.2 49.987,27.768 51.912,27.768 52.911,26.768 56.361,26.768 v1(56.586,26.993)
PB8: U1.61 U5.4 | length 15
  Top Layer w0.25: U1.61 59.985,30.405 59.985,26.118 63.716,22.387 U5.4
PB9: R45.1 U1.62 | length 15.8
  Top Layer w0.25: U1.62 60.559,30.273 60.559,27.393 v1(62.584,25.369)
  Bottom Layer w0.4: v1(62.584,25.369) 64.446,23.507 R45.1
PB10: R10.2 R29.1 U1.29 | length 100
  Top Layer w0.25: U1.29 68.283,45.067 68.283,47.063 69.457,48.238 69.457,54.611 v1(71.532,56.685)
  Top Layer w0.4: v1(21.47,78.052) 21.07,77.653 21.07,70.404 20.745,70.079 20.745,66.655 21.544,65.856 ; v1(21.569,58.235) 21.569,59.31 21.569,65.858
  Bottom Layer w0.4: R10.2 14.128,76.953 20.37,76.953 v1(21.47,78.052)
  Bottom Layer w0.5: R29.1 10.52,79.005 13.32,76.205 R10.2 ; v1(21.569,58.235) 25.393,58.235 26.318,57.31 28.143,57.31 28.343,57.51 69.257,57.51 70.082,56.685 v1(71.532,56.685)
PB11: Q6.3 R26.2 U1.30 | length 86.4
  Top Layer w0.25: U1.30 67.733,45.224 67.733,47.388 68.807,48.463 v1@68.807,55.586
  Top Layer w0.4: R26.2 13.996,67.58 v1@14.071,67.655 ; v1(22.544,66.655) 22.444,66.555 22.444,59.335 22.894,58.885 v1(22.894,57.01) v1@22.844,56.96 ; v1@68.807,55.586 v1(69.157,55.936)
  Top Layer w0.5: R26.2 11.88,70.513 v1(11.947,70.579)
  Bottom Layer w0.4: v1(14.021,67.605) 14.746,66.88 22.319,66.88 v1(22.544,66.655)
  Bottom Layer w0.5: v1(11.947,70.579) 11.947,71.969 Q6.3 ; v1(22.894,57.01) 22.894,57.06 24.994,57.06 25.593,56.461 28.668,56.461 28.793,56.586 68.482,56.586 69.132,55.936 v1(69.157,55.936)
PB12: R3.2 U1.33 | length 85.5
  Top Layer w0.25: U1.33 60.335,46.563 60.335,47.188 62.134,48.987 62.134,50.712 63.084,51.662
  Top Layer w0.5: v1(27.018,58.632) 27.018,66.155 28.443,67.58 28.443,69.93 29.367,70.854 29.367,77.389 R3.2 ; 63.084,51.662 69.782,58.36 v1(70.332,58.36)
  Bottom Layer w0.5: v1(27.018,58.632) 27.243,58.407 v1@70.332,58.51
PB13: R11.2 U1.34 | length 71.3
  Top Layer w0.25: 61.609,51.612 61.284,51.287 61.284,49.212 59.585,47.513 59.585,46.605 U1.34
  Top Layer w0.5: R11.2 42.111,79.33 v1(42.164,79.277) ; 61.609,51.612 70.332,60.335 70.332,77.078 v1(71.232,77.977)
  Bottom Layer w0.5: v1(42.164,79.277) 43.314,78.127 52.961,78.127 53.186,77.902 56.985,77.902 57.26,78.177 63.659,78.177 63.884,77.952 71.207,77.952 v1(71.232,77.977)
PB14: R17.2 U1.35 | length 57.2
  Top Layer w0.25: 60.534,51.612 60.534,49.387 58.86,47.713 58.86,46.623 U1.35
  Top Layer w0.5: R17.2@54.361,79.227 55.511,79.227 v1(55.536,79.252) ; 60.534,51.612 60.534,51.962 69.282,60.709 69.282,78.702 v1(69.882,79.302)
  Bottom Layer w0.5: v1(55.536,79.252) 55.636,79.252 55.686,79.302 v1(69.882,79.302)
PB15: R21.2 U1.36 | length 42.1
  Top Layer w0.25: 59.61,51.662 59.61,49.512 58.135,48.038 58.135,46.641 U1.36
  Top Layer w0.5: 59.61,51.662 59.61,52.337 68.308,61.034 68.308,78.649 R21.2
PC0: 
PC0: C21.2 R27.1 R28.1 U1.8 | length 67.1
  Top Layer w0.25: U1.8 70.882,30.358 v1(70.882,29.467)
  Top Layer w0.4: v1(36.391,21.569) 36.391,31.842 v1(36.516,31.717)
  Bottom Layer w0.4: R27.1 36.357,21.486 36.416,21.544 v1(36.391,21.569) ; v1(36.516,31.717) 55.236,31.717 58.135,28.818 68.183,28.818 68.632,29.268 70.682,29.268 v1(70.882,29.467)
  Bottom Layer w0.5: R28.1@28.156,25.105 28.118,25.066 R28.1@28.186,24.998 ; R27.1@28.693,21.317 28.268,21.742 28.268,25.005 28.368,25.105 27.857,25.105 C21.2
PC5: R2.1 R46.1 U1.25 | length 99.3
  Top Layer w0.25: U1.25 70.886,44.842 70.886,46.293 72.481,47.888 v1(72.481,51.087)
  Top Layer w0.4: v1(14.646,61.634) 14.696,61.634 14.696,65.758 15.971,67.033 15.971,79.67 R2.1 ; v1(47.613,62.309) 47.788,62.134 47.788,51.237 47.763,51.212 v1(47.763,51.087)
  Bottom Layer w0.4: v1(14.646,61.634) 42.839,61.634 43.514,62.309 v1(47.613,62.309) ; v1(47.763,51.087) v1(72.481,51.087)
PC6: R4.1 U1.37 | length 37.8
  Top Layer w0.25: v1(57.21,52.212) 57.21,46.858 U1.37
  Top Layer w0.5: R4.1 46.519,68.999 48.763,66.755 48.763,52.637 v1(48.887,52.512)
  Bottom Layer w0.4: v1(48.887,52.512) 49.187,52.212 v1(57.21,52.212)
PC7: R6.1 U1.38 | length 51.4
  Top Layer w0.25: v1(56.036,53.411) 56.036,47.326 U1.38
  Top Layer w0.5: R6.1 34.635,68.899 v1(34.691,68.955) ; v1(48.862,69.48) 49.662,68.68 49.662,54.111 v1(50.012,53.761)
  Bottom Layer w0.4: v1(50.012,53.761) 50.012,53.636 50.237,53.411 v1(56.036,53.411)
  Bottom Layer w0.5: v1(34.691,68.955) 35.616,69.88 48.463,69.88 v1(48.862,69.48)
PC8: R7.1 U1.39 | length 62.6
  Top Layer w0.25: 52.736,56.058 52.736,44.764 v1(52.811,44.689) ; v1(57.335,44.689) 57.966,44.689 U1.39
  Top Layer w0.5: R7.1 26.562,68.899 v1(26.562,68.924) ; 52.736,56.058 52.736,57.435 53.136,57.835 53.136,62.234 52.736,62.634 v1(52.736,69.38)
  Bottom Layer w0.4: v1(52.811,44.689) v1(57.335,44.689)
  Bottom Layer w0.5: v1(26.562,68.924) 29.074,68.924 30.242,67.755 51.112,67.755 v1(52.736,69.38)
PC9: R9.1 U1.40 | length 47.1
  Top Layer w0.25: 53.561,56.008 53.561,46.413 v1(53.811,46.163) ; v1@55.811,45.863 55.811,44.214 56.536,43.489 58.459,43.489 U1.40
  Top Layer w0.5: R9.1 41.014,66.28 v1(41.139,66.405) ; 53.561,56.008 53.561,56.933 55.786,59.157 55.786,66.43 v1(55.461,66.755)
  Bottom Layer w0.4: v1(53.811,46.163) 55.511,46.163 v1@55.811,45.863
  Bottom Layer w0.5: v1(41.139,66.405) 41.364,66.63 55.336,66.63 v1(55.461,66.755)
  other v1: 55.961,45.863
PC10: R12.1 R47.1 U1.51 | length 66.3
  Top Layer w0.25: v1(55.886,34.316) 56.825,34.316 U1.51
  Top Layer w0.4: R12.1 33.121,62.88 v1(33.192,62.809) 36.691,62.809 38.72,60.78 R47.1 ; v1(50.487,33.941) 50.387,34.041 50.387,52.362 51.387,53.361 51.387,57.41 52.412,58.435 52.412,61.509 v1(51.062,62.859)
  Bottom Layer w0.4: v1(33.192,62.809) 42.089,62.809 42.664,63.384 46.913,63.384 47.213,63.684 49.662,63.684 50.487,62.859 v1(51.062,62.859) ; v1@50.387,34.041 55.636,34.066 v1(55.886,34.316)
PC11: R14.1 U1.52 | length 44.8
  Top Layer w0.25: 55.264,55.986 54.886,55.608 54.886,45.263 52.412,42.789 52.412,34.391 53.686,33.117 56.332,33.117 U1.52
  Top Layer w0.5: 55.264,55.986 58.285,59.007 58.285,67.998 R14.1
PC12: R15.1 R48.1 U1.53 | length 56.1
  Top Layer w0.25: 51.537,35.166 51.537,34.466 53.486,32.517 56.439,32.517 56.926,33.004 U1.53
  Top Layer w0.4: 51.537,35.166 v1(51.537,49.762) ; v1(58.26,49.937) 58.535,50.212 58.535,54.086 61.884,57.435 61.884,68.709 R15.1 ; 61.884,62.059 61.905,62.08 R48.1
  Bottom Layer w0.4: v1(51.537,49.762) 51.712,49.937 v1(58.26,49.937)
PF3: 
PF3: 
PF3: 
PF3: 
PF3: 
PF3: 
PF3: 
PF3: 
PF3: 
PF3: 
PF3: 
PF3: 
PF3: 
PF3: 
PF3: 
PF3: 
PF3: 
PF3: 
RES: JP7.10 U1.7 | length 28.5
  Top Layer w0.25: U1.7 69.332,31.201 v1(69.332,27.893)
  Bottom Layer w0.4: JP7.10 55.364,30.439 57.91,27.893 v1(69.332,27.893) 69.307,27.918 v1@69.257,27.868
RST: 
UA: 
VREF: 
X0: 
X1: 
X2: 
pads on no net: JP1.0 JP2.0 JP3.0 JP4.0 JP5.0 JP6.0 JP8.0 K1.2 K2.2 U1.1 U1.2 U1.3 U1.4 U1.5 U1.6 U1.9 U1.10 U1.11 U1.14 U1.15 U1.16 U1.17 U1.24 U1.28 U1.41 U1.42 U1.43 U1.44 U1.45 U1.54 U1.57 U2.1 U2.2 U2.3 U3.1 U3.2 U3.7 U3.10 U3.11 U4.7

## Polygon pours and split planes (outlines as drawn)
GND on Top Layer (hatched 90Degree grid 0.1 track 0.3, remove dead copper): -3.674,27.543 22.394,27.543 33.716,16.221 41.364,16.221 43.439,18.295 55.986,18.295 57.36,19.67 57.36,24.269 58.26,25.169 61.484,25.169 62.459,24.194 62.459,7.523 63.459,6.523 72.456,6.523 72.456,-3.074 82.579,-3.074 82.579,92.526 -2.574,92.526 -2.574,27.593
+3V3 on Bottom Layer (hatched 90Degree grid 0.1 track 0.3, remove dead copper): 55.286,39.215 55.286,35.916 61.984,29.218 65.633,29.218 72.007,35.591 72.007,39.44 66.158,45.288 61.409,45.288 55.286,39.165
GND on Bottom Layer (hatched 90Degree grid 0.1 track 0.3, remove dead copper): -3.674,27.543 22.394,27.543 33.716,16.221 41.364,16.221 43.439,18.295 55.986,18.295 57.36,19.67 57.36,24.269 58.26,25.169 61.484,25.169 62.459,24.194 62.459,7.523 63.459,6.523 72.456,6.523 72.456,-3.074 82.579,-3.074 82.579,92.526 -2.574,92.526 -2.574,27.593

## Keep-outs
Keep-Out Layer:
  lines w0.3: 76.5,90 cw(c76.5,86.5) 80,86.5 80,3.5 cw(c76.5,3.5) 76.5,0 3.5,0 cw(c3.5,3.5) 0,3.5 0,86.5 cw(c3.5,86.5) 3.5,90 76.5,90.002

## Text inside footprints (layer, text, board x,y; h text height)
Q2: Bottom Overlay "3" at 73.088,16.856 h1 r180; Bottom Overlay "1" at 68.76,16.856 h1 r180
U104: Top Overlay "3" at 67.849,11.049 h1 r270; Top Overlay "1" at 67.849,15.292 h1 r270